# Altium PCB PCB1.PcbDoc
Units mil, origin at the board's own origin, x right, y up, seen from the top; angles counter-clockwise.
Board outline 6000 x 4000 mil, 2 copper layers (Top Layer, Bottom Layer); 17 components, 30 nets, 91 pads, 0 vias.
Unrouted connection lines stored in the file: 61.
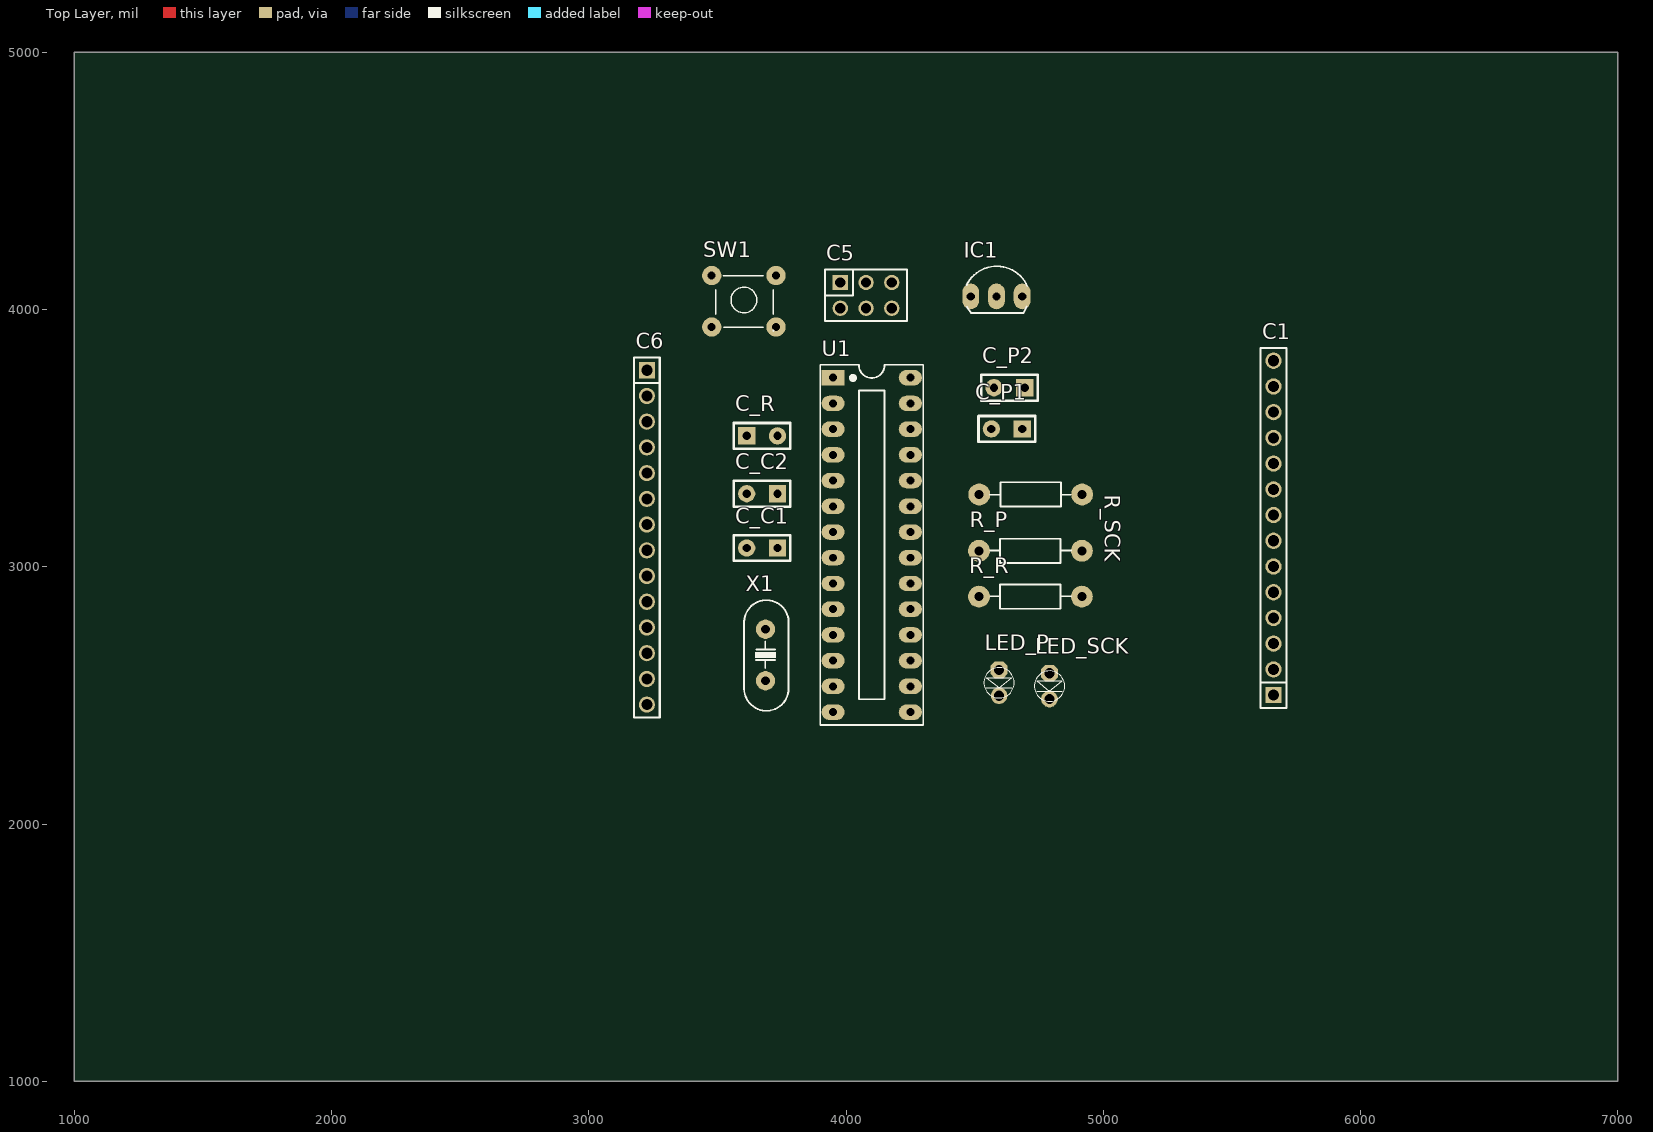
[diagram p0: Top Layer view]
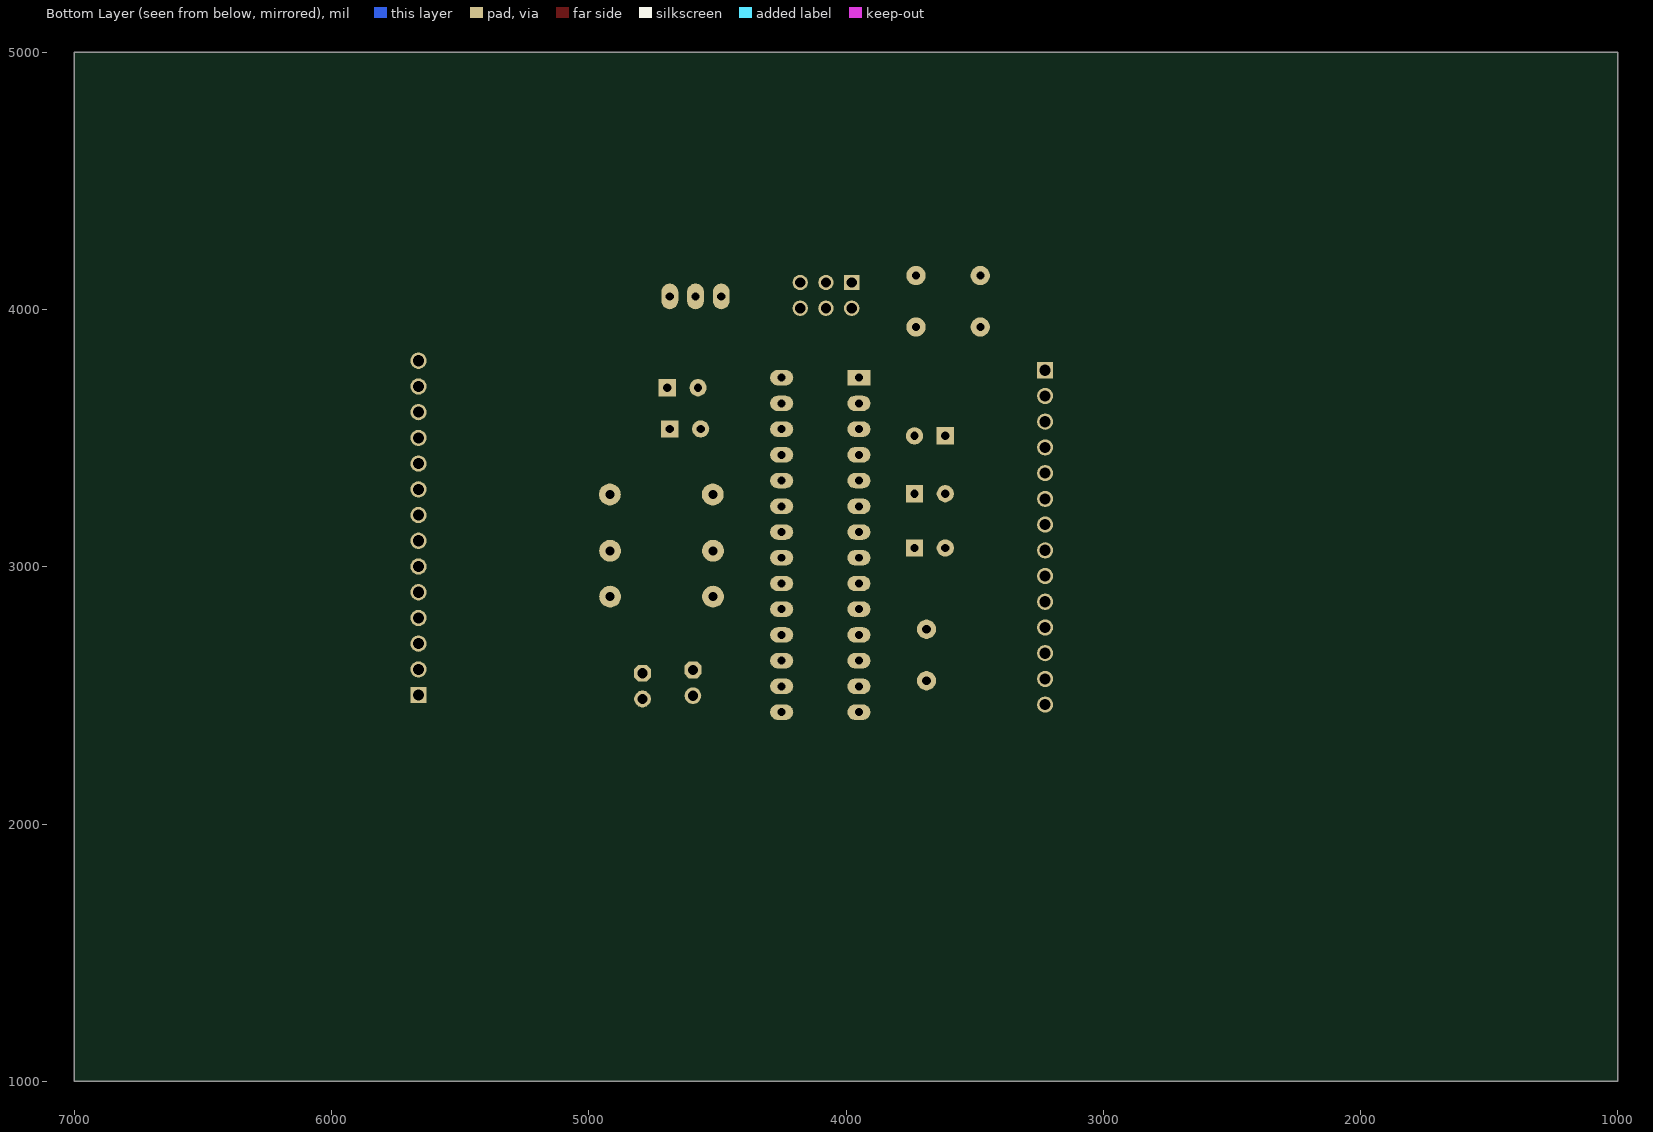
[diagram p1: Bottom Layer view, seen from below]

## Layer stack, top to bottom
Top Solder: solder mask 0.4, Solder Resist, Dk 3.5
Top Layer: signal copper 1.4
Dielectric 1: dielectric 12.6, FR-4, Dk 4.8
Bottom Layer: signal copper 1.4
Bottom Solder: solder mask 0.4, Solder Resist, Dk 3.5

## Board outline
1000,1000 7000,1000 7000,5000 1000,5000

## Design rules (kind name [scope] priority, off if disabled: settings)
Clearance [All] p1: gap=30
PolygonConnect [All] p1: connectstyle=Relief reliefconductorwidth=10 reliefentries=4 polygonreliefangle="90 Angle" airgapwidth=10
RoutingVias [All] p1: holewidth=28 width=50 viastyle="Through Hole" minholewidth=28 minwidth=50 maxholewidth=28 maxwidth=50
SolderMaskExpansion [All] p1: expansion=4
Width [All] p1: maxlimit=30 minlimit=10 preferedwidth=20
30 further rules are at their usual default settings.

## Components (designator, comment, footprint, x,y, rotation, side; value= is the part's Value field where it differs from the comment)
C1 "JP14" JP14-D1T 5662,2501 r90 top
C5 "JP3x2" JP3-C2T 4078,4055 r0 top
C6 "JP14" JP14-D1T 3226,3764 r270 top
C_C1 "Cap Non-pol" "Cap Non-Pol 3mm" 3674,3073 r180 top
C_C2 "Cap Non-pol" "Cap Non-Pol 3mm" 3674,3284 r180 top
C_P1 "Cap Non-pol" "Cap Non-Pol 3mm" 4625,3536 r180 top
C_P2 "Cap Non-pol" "Cap Non-Pol 3mm" 4635,3696 r180 top
C_R "Cap Non-pol" "Cap Non-Pol 3mm" 3674,3509 r0 top
IC1 "LM78xx" TO92-321 4585,4051 r0 top
LED_P "LED" LED-3MM-BLUE 4595,2544 r270 top
LED_SCK "LED" LED-3MM-BLUE 4791,2531 r270 top
R_P "Res" RES-1/4W 4702,3067 r180 top
R_R "10k" RES-1/4W 4702,2889 r180 top
R_SCK "Res" RES-1/4W 4733,3276 r0 top
SW1 "SW" SW2-DIP 3478,4132 r0 top
U1 "ATmega328-PU" DIP28 3950,3735 r270 top
X1 "16Mhz" XT2 3687,2657 r270 top

## Footprints (in the part's own frame and the unit in brackets; to place one, negate y for a bottom-side part, rotate by r counter-clockwise, add the part's x,y. Pads: shape width x height; smd on the part's side, far side on the other; paste and mask are expansions set on the pad)
"Cap Non-Pol 3mm" [mil] "Capacitor, Radial; Body 5.6 x 2.5 mm (L x W typ); Pin Spacing 3 mm (typ); Solder Pad 35mil"
  rect 67x67 hole 32: 1(-60,0)
  round 67 hole 32: 2(60,0)
  silkscreen extent -110,-50 110,50, body extent -115,-33 115,34, height 245
DIP28 [mil] "DIP, 18-Leads, Row Spacing 7.62mm, Pitch 2.54mm, Body 22.8x7.3mm, Window"
  rect 60x90 hole 31: 1(0,0)
  oval 60x90 hole 31: 2(100,0) 3(200,0) 4(300,0) 5(400,0) 6(500,0) 7(600,0) 8(700,0) 9(800,0) 10(900,0) 11(1000,0) 12(1100,0) 13(1200,0) 14(1300,0) 15(1300,300) 16(1200,300) 17(1100,300) 18(1000,300) 19(900,300) 20(800,300) 21(700,300) 22(600,300) 23(500,300) 24(400,300) 25(300,300) 26(200,300) 27(100,300) 28(0,300)
  silkscreen extent -50,-50 1350,350, body extent -50,-10 1367,300, height 200
JP3-C2T [mm] "6 pins, dual row, straight, gold plating"
  rect 1.52x1.52 hole 1.02: 1(-2.54,1.27)
  round 1.52 hole 1.02: 2(0,1.27) 3(2.54,1.27) 4(2.54,-1.27) 5(0,-1.27) 6(-2.54,-1.27)
  silkscreen extent -4.06,-2.54 4.06,2.54, body extent -4.06,-2.54 4.06,2.54, height 8.51
JP14-D1T [mm] "14 pins, 1 row, straight, gold plating"
  rect 1.6x1.6 hole 1.1: 1(0,0)
  round 1.6 hole 1.1: 2(2.54,0) 3(5.08,0) 4(7.62,0) 5(10.16,0) 6(12.7,0) 7(15.24,0) 8(17.78,0) 9(20.32,0) 10(22.86,0) 11(25.4,0) 12(27.94,0) 13(30.48,0) 14(33.02,0)
  silkscreen extent -1.27,-1.27 34.29,1.27, body extent -1.27,-1.27 34.29,1.27, height 8.54
LED-3MM-BLUE [mil]
  oct 65x65 hole 40: 1(-55,0)
  round 65 hole 40: 2(45,0)
  silkscreen extent -64,-59 54,59, body extent -72,-65 54,65, height 184
RES-1/4W [mil]
  round 85 hole 35: 1(-215,5) 2(185,5)
  silkscreen extent -173,-42 141,52, body extent -227,-42 197,52, height 95
SW2-DIP [mil] "SW button 4pin, 250 x250 mil"
  round 75 hole 31: 1(0,0) 2(0,-200) 3(250,-200) 4(250,0)
  silkscreen extent 15,-215 240,0, body extent -36,-220 276,24, height 276
TO92-321 [mil] "TO-92"
  oval 66x100 hole 32: 1(100,0) 2(0,0) 3(-100,0)
  silkscreen extent -117,-65 120,118, body extent -109,-66 109,95, height 245
XT2 [mil] "Footpin for Crystal 2 pin"
  round 75 hole 34: 1(-100,0) 2(100,0)
  silkscreen extent -213,-83 217,90, body extent -216,-87 216,90, height 144

## Part data
C1 C6: "WR-PHD 2.54 mm Angled Socket Header"
C5: "WR-PHD 2.54 mm Dual Socket Header"
C_C1 C_C2 C_P1 C_P2 C_R: "Non-polarized Capacitor"
IC1: "Positive Voltage Regulator"
LED_P LED_SCK: "LED Single colour Green and Red"
R_R: library part Res, "Res"
SW1: library part SW4, "Switch button 4 pin"
U1: "8-bit AVR Microcontroller, 32KB Flash, 1KB EEPROM, 2KB SRAM, 28-pin PDIP, Industrial Grade (-40°C to 85°C)"
X1: library part XT2, "Crystal, 32.768 KHz, -40 to 85 degC, 3.2 x 1.5 x 0.9 mm SMD"

## Nets (pads, with @x,y where several pads share a name; then routed paths per layer and width w, separated by ;. In a path a pad name is that pad's centre, name@x,y a point inside that pad or via, vN(x,y) a via of type N, cw(c..) or ccw(c..) an arc to the next point about the centre after c; other vN are vias at no path point)
GND: C1.11 C1.12 C1.13 C1.14 C5.4 C_C1.2 C_C2.2 C_P1.1 C_P2.1 IC1.2 LED_P.2 LED_SCK.2 SW1.1 SW1.4 U1.8 U1.22
NetC1_1: C1.1 U1.23
NetC1_2: C1.2 U1.24
NetC1_3: C1.3 U1.25
NetC1_4: C1.4 U1.26
NetC1_5: C1.5 U1.27
NetC1_6: C1.6 U1.28
NetC5_1: C5.1 C6.13 U1.18
NetC5_2: C5.2 C6.14 R_SCK.1 U1.19
NetC5_3: C5.3 C_R.2
NetC5_5: C5.5 C6.12 U1.17
NetC6_1: C6.1 U1.2
NetC6_2: C6.2 U1.3
NetC6_3: C6.3 U1.4
NetC6_4: C6.4 U1.5
NetC6_5: C6.5 U1.6
NetC6_6: C6.6 U1.11
NetC6_7: C6.7 U1.12
NetC6_8: C6.8 U1.13
NetC6_9: C6.9 U1.14
NetC6_10: C6.10 U1.15
NetC6_11: C6.11 U1.16
NetC_C1_1: C_C1.1 U1.9 X1.2
NetC_C2_1: C_C2.1 U1.10 X1.1
NetC_P2_2: C_P2.2 U1.21
NetC_R_1: C_R.1 R_R.2 SW1.2 SW1.3 U1.1
NetLED_P_1: LED_P.1 R_P.2
NetLED_SCK_1: LED_SCK.1 R_SCK.2
VCC: C1.7 C1.8 C1.9 C5.6 C_P1.2 IC1.3 R_P.1 R_R.1 U1.7 U1.20
VIN: C1.10 IC1.1